# EAGLE board NQSMHS-1 (EAGLE 5.11)
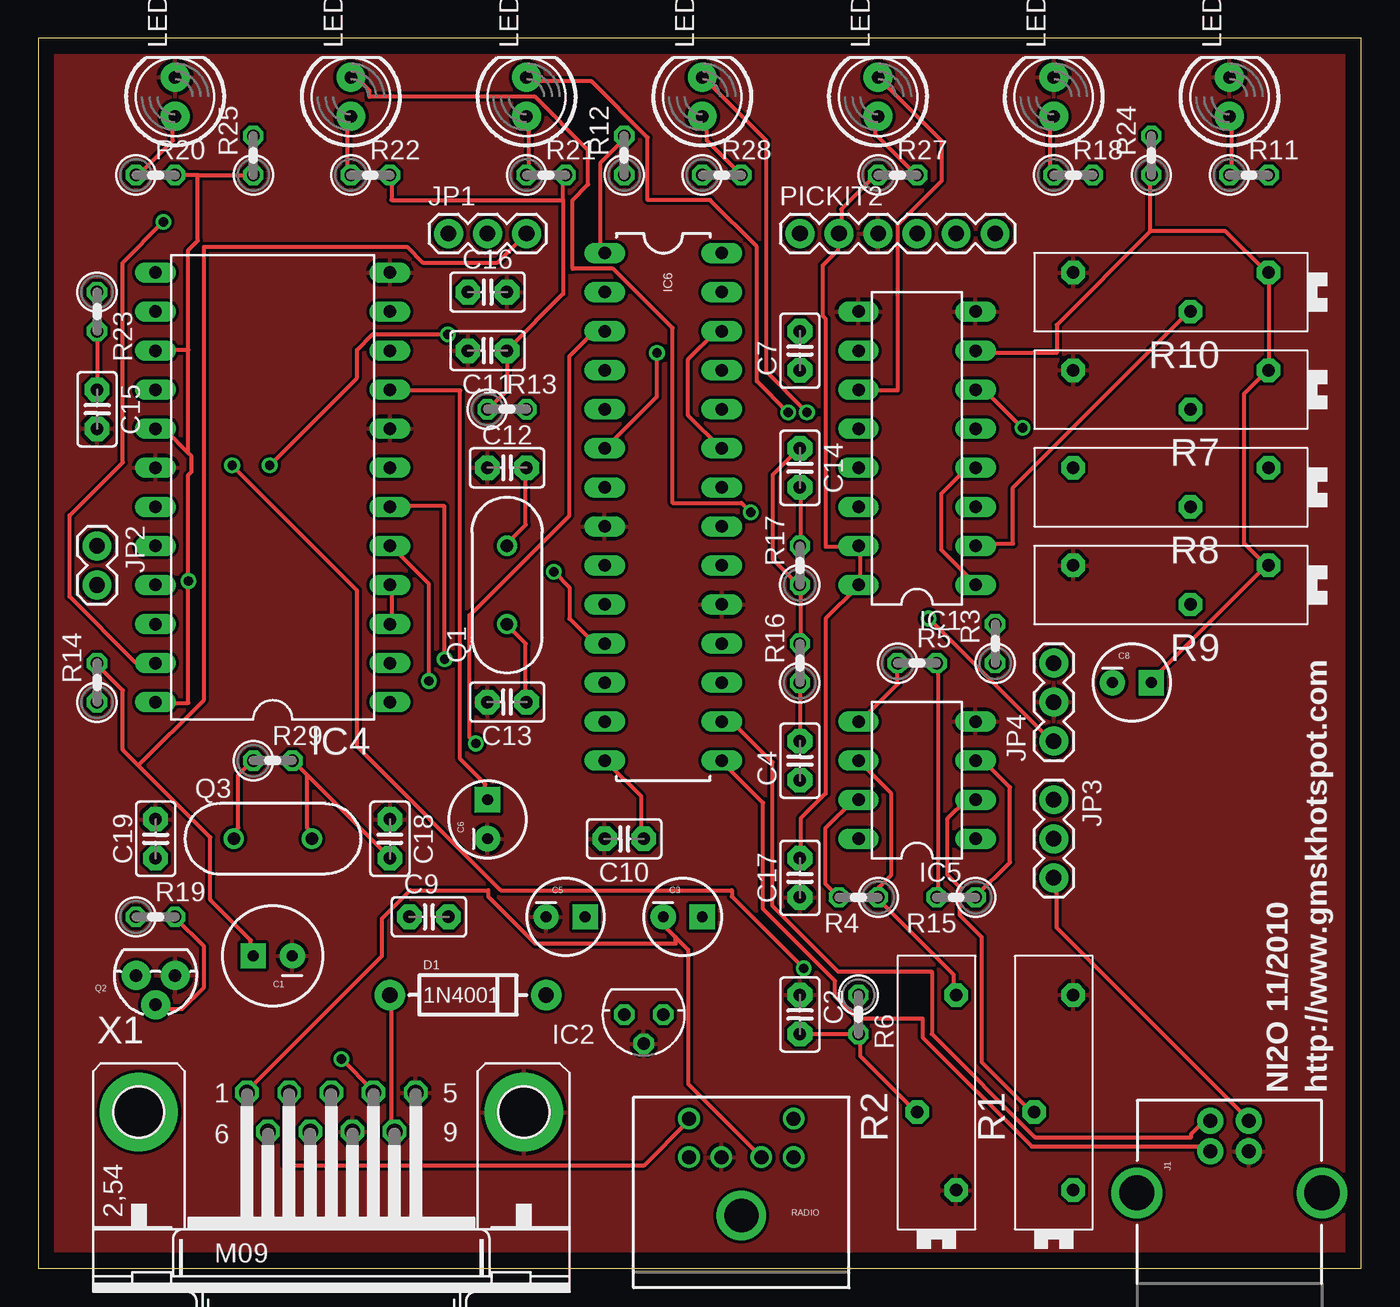
[diagram p0: board, top side]
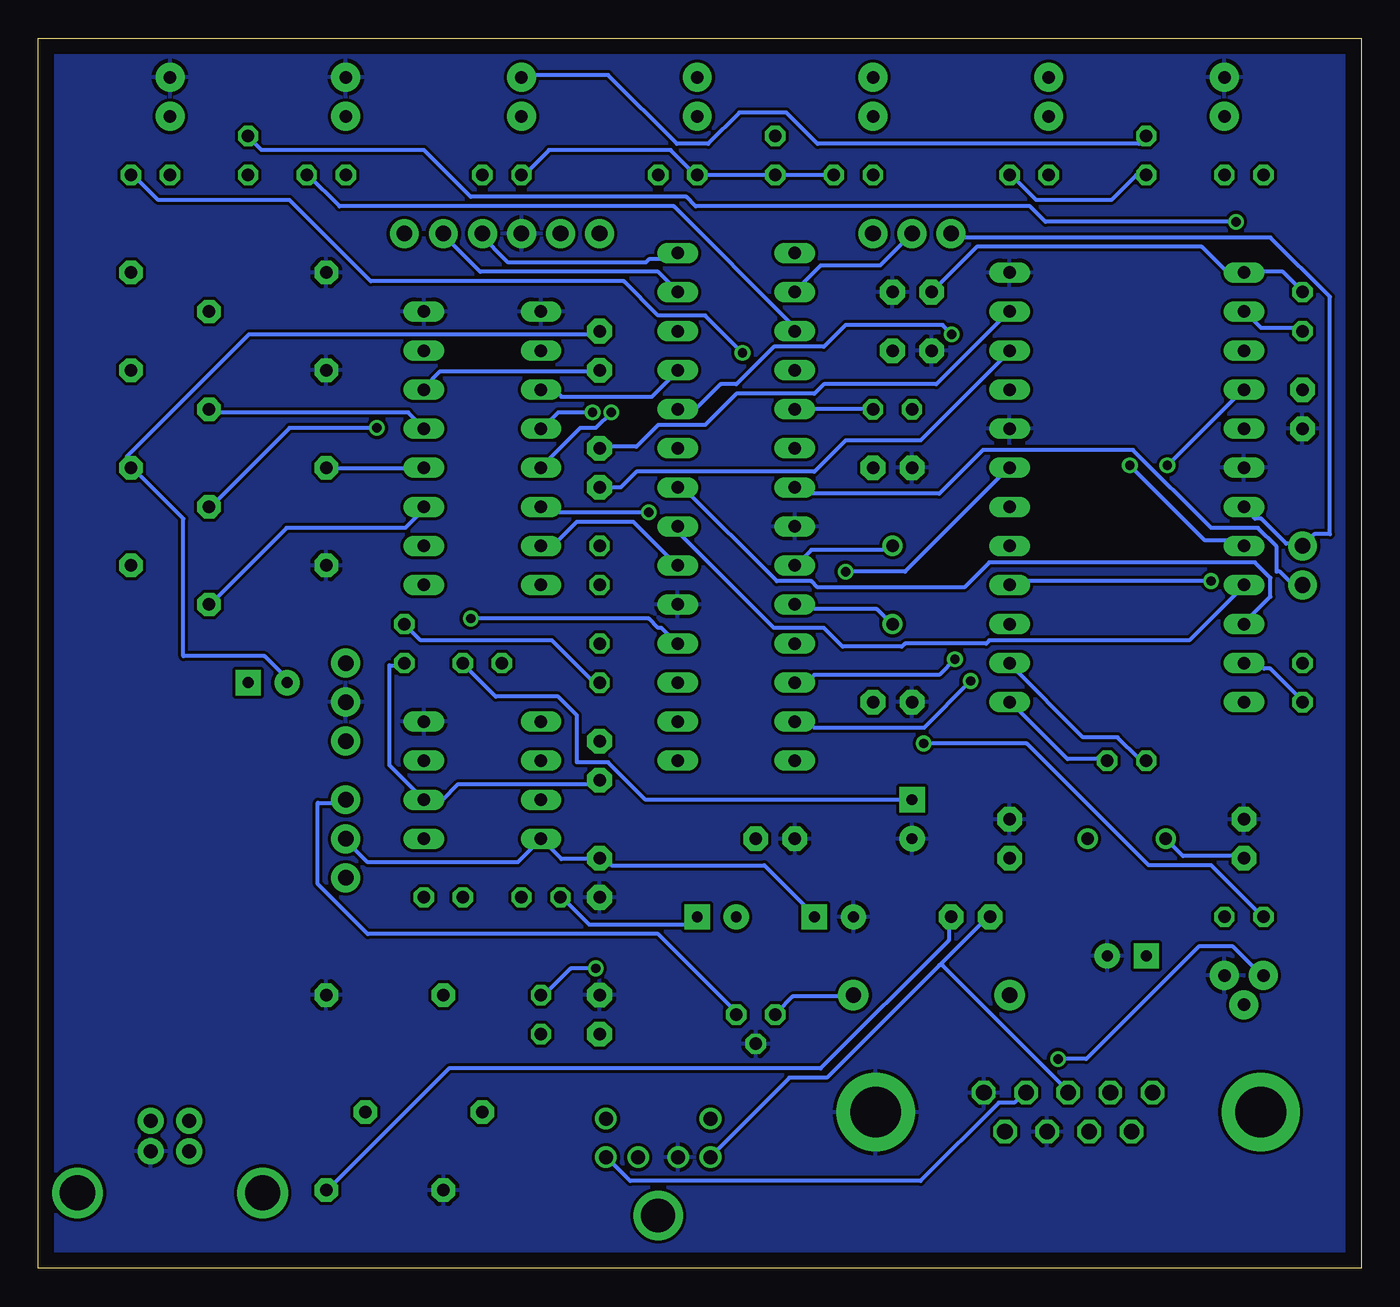
[diagram p1: board, bottom side, seen from below]

Size 86.03 x 80 mm. Coordinates in mm from the lower left corner, seen from the top.
Outline: 0,0 86.03,0 86.03,80 0,80 0,0
Copper layers (1*16): Top 0.035mm / dielectric 1.5mm / Bottom 0.035mm
Design rules "default": minimum track width 10mil, minimum drill 24mil, track to track 8mil, track to pad 8mil, pad to pad 8mil, via to via 8mil, smd to smd 8mil, copper to edge 40mil, drill to drill 8mil, minimum pad ring 10mil, minimum via ring 8mil, stop-mask expansion 4mil, vias tented up to drill 0mil, thermal gap 10mil

## Footprints (pad centres in the part's own frame; a part is rotated, then mirrored left to right if it is on the bottom)
CPOL-RADIAL-100UF-25V = drill 0.7 pad 1.651 square: 1 1.27,0 | drill 0.7 pad 1.651 round: 2 -1.27,0
C2.5-2 = drill 0.813 pad 1.6 octagon: 1 -1.27,0; 2 1.27,0
CPOL-RADIAL-10UF-25V = drill 0.7 pad 1.651 square: 1 1.27,0 | drill 0.7 pad 1.651 round: 2 -1.27,0
DIODE-1N4001 = drill 1 pad 1.981 round: A -5.08,0; C 5.08,0
CA6V = drill 1.016 long: A -2.54,-2.54; E 2.54,-2.54; S 0,2.54
DIL16 = drill 0.813 long: 1 -8.89,-3.81; 2 -6.35,-3.81; 3 -3.81,-3.81; 4 -1.27,-3.81; 5 1.27,-3.81; 6 3.81,-3.81; 7 6.35,-3.81; 8 8.89,-3.81; 9 8.89,3.81; 10 6.35,3.81; 11 3.81,3.81; 12 1.27,3.81; 13 -1.27,3.81; 14 -3.81,3.81; 15 -6.35,3.81; 16 -8.89,3.81
78LXX = drill 0.813 octagon: GND 0,1.905; IN 1.27,0; OUT -1.27,0
DIL24-6 = drill 0.813 long: 1 -13.97,-7.62; 2 -11.43,-7.62; 3 -8.89,-7.62; 4 -6.35,-7.62; 5 -3.81,-7.62; 6 -1.27,-7.62; 7 1.27,-7.62; 8 3.81,-7.62; 9 6.35,-7.62; 10 8.89,-7.62; 11 11.43,-7.62; 12 13.97,-7.62; 13 13.97,7.62; 14 11.43,7.62; 15 8.89,7.62; 16 6.35,7.62; 17 3.81,7.62; 18 1.27,7.62; 19 -1.27,7.62; 20 -3.81,7.62; 21 -6.35,7.62; 22 -8.89,7.62; 23 -11.43,7.62; 24 -13.97,7.62
DIL08 = drill 0.813 long: 1 -3.81,-3.81; 2 -1.27,-3.81; 3 1.27,-3.81; 4 3.81,-3.81; 5 3.81,3.81; 6 1.27,3.81; 7 -1.27,3.81; 8 -3.81,3.81
DIL28-3 = drill 0.813 long: 1 -16.51,-3.81; 2 -13.97,-3.81; 3 -11.43,-3.81; 4 -8.89,-3.81; 5 -6.35,-3.81; 6 -3.81,-3.81; 7 -1.27,-3.81; 8 1.27,-3.81; 9 3.81,-3.81; 10 6.35,-3.81; 11 8.89,-3.81; 12 11.43,-3.81; 13 13.97,-3.81; 14 16.51,-3.81; 15 16.51,3.81; 16 13.97,3.81; 17 11.43,3.81; 18 8.89,3.81; 19 6.35,3.81; 20 3.81,3.81; 21 1.27,3.81; 22 -1.27,3.81; 23 -3.81,3.81; 24 -6.35,3.81; 25 -8.89,3.81; 26 -11.43,3.81; 27 -13.97,3.81; 28 -16.51,3.81
USB-B-PTH = drill 0.914 pad 1.676 round: D+ 0,1.25; D- 1.981,1.25; GND 0,-1.25; VBUS 1.981,-1.25 | drill 2.286 round: P$1 -2.718,-6.02; P$2 -2.718,6.02
1X03 = drill 1.016 pad 1.88 round: 1 0,0; 2 2.54,0; 3 5.08,0
1X02 = drill 1.016 pad 1.88 round: 1 0,0; 2 2.54,0
LED5MM = drill 0.813 pad 1.88 round: A -1.27,0; K 1.27,0
1X06 = drill 1.016 pad 1.88 round: 1 0,0; 2 2.54,0; 3 5.08,0; 4 7.62,0; 5 10.16,0; 6 12.7,0
HC49US = drill 0.813 round: 1 -2.54,0; 2 2.54,0
TO-92 = drill 0.813 pad 1.88 round: 1 -1.27,0; 2 0,1.905; 3 1.27,0
PT-SPIN = drill 0.813 pad 1.524 octagon: 1 -6.35,-1.27; 2 6.35,-1.27; 3 -1.27,1.27
0207/2V = drill 0.813 octagon: 1 -1.27,0; 2 1.27,0
MINI-DIN6 = drill 0.9 round: 1 -1.3,-8.5; 2 1.3,-8.5; 3 -3.4,-8.5; 4 3.4,-8.5; 5 -3.4,-11; 6 3.4,-11 | drill 2.2 round: P$1 0,-4.7
M09HP = drill 1.016 octagon: 1 -5.486,1.27; 2 -2.743,1.27; 3 0,1.27; 4 2.743,1.27; 5 5.486,1.27; 6 -4.115,-1.27; 7 -1.372,-1.27; 8 1.372,-1.27; 9 4.115,-1.27 | drill 3.302 pad 5.08 round: G1 -12.522,0; G2 12.522,0

## Placement (x,y rotation side)
C1  10uF  [CPOL-RADIAL-100UF-25V]  15.24,20.32 180 top
C2  22pF  [C2.5-2]  49.53,16.51 270 top
C3  4.7uF  [CPOL-RADIAL-10UF-25V]  41.91,22.86 0 top
C4  330p  [C2.5-2]  49.53,33.02 90 top
C5  47uF  [CPOL-RADIAL-10UF-25V]  34.29,22.86 0 top
C6  1uF  [CPOL-RADIAL-10UF-25V]  29.21,29.21 90 top
C7  0.1uF  [C2.5-2]  49.53,59.69 90 top
C8  10uF  [CPOL-RADIAL-10UF-25V]  71.12,38.1 0 top
C9  0.1uF  [C2.5-2]  25.4,22.86 0 top
C10  0.1uF  [C2.5-2]  38.1,27.94 180 top
C11  0.1uF  [C2.5-2]  29.21,59.69 180 top
C12  22pF  [C2.5-2]  30.48,52.07 0 top
C13  22pF  [C2.5-2]  30.48,36.83 180 top
C14  22pF  [C2.5-2]  49.53,52.07 270 top
C15  0.1uF  [C2.5-2]  3.81,55.88 270 top
C16  0.1uF  [C2.5-2]  29.21,63.5 0 top
C17  0.1uF  [C2.5-2]  49.53,25.4 90 top
C18  22pF  [C2.5-2]  22.86,27.94 270 top
C19  22pF  [C2.5-2]  7.62,27.94 90 top
D1  1N4001  [DIODE-1N4001]  27.94,17.78 0 top
E$1  [CA6V]  100.33,19.05 180 top  (outside the outline)
E$2  [CA6V]  111.76,20.32 180 top  (outside the outline)
E$3  [CA6V]  111.76,29.21 180 top  (outside the outline)
E$4  [CA6V]  111.76,40.64 180 top  (outside the outline)
E$5  [CA6V]  110.49,52.07 180 top  (outside the outline)
E$6  [CA6V]  109.22,62.23 180 top  (outside the outline)
IC1  MAX8213  [DIL16]  57.15,53.34 90 top
IC2  78L05  [78LXX]  39.37,16.51 180 top
IC4  CMX589PA4  [DIL24-6]  15.24,50.8 90 top
IC5  LM4558  [DIL08]  57.15,31.75 90 top
IC6  PIC18F2550  [DIL28-3]  40.64,49.53 270 top
J1  USBPTH  [USB-B-PTH]  77.47,7.62 90 top
JP1  SW4  [1X03]  26.67,67.31 0 top
JP2  SW3  [1X02]  3.81,46.99 270 top
JP3  SW1  [1X03]  66.04,30.48 270 top
JP4  SERIAL  [1X03]  66.04,34.29 90 top
LED1  COS  [LED5MM]  77.47,76.2 90 top
LED2  PWR  [LED5MM]  8.89,76.2 90 top
LED3  PTT  [LED5MM]  66.04,76.2 90 top
LED4  MED  [LED5MM]  31.75,76.2 90 top
LED5  LOW  [LED5MM]  43.18,76.2 90 top
LED6  DCOS  [LED5MM]  54.61,76.2 90 top
LED7  HIGH  [LED5MM]  20.32,76.2 90 top
PICKIT2  PICKIT2  [1X06]  49.53,67.31 0 top
Q1  24MHz  [HC49US]  30.48,44.45 90 top
Q2  2N3904  [TO-92]  7.62,19.05 180 top
Q3  4.9152MHz  [HC49US]  15.24,27.94 0 top
R1  500K  [PT-SPIN]  66.04,11.43 90 top
R2  500K  [PT-SPIN]  58.42,11.43 90 top
R3  180K  [0207/2V]  62.23,40.64 90 top
R4  47K  [0207/2V]  53.34,24.13 180 top
R5  510K  [0207/2V]  57.15,39.37 0 top
R6  100K  [0207/2V]  53.34,16.51 270 top
R7  100K  [PT-SPIN]  73.66,57.15 180 top
R8  10K  [PT-SPIN]  73.66,50.8 180 top
R9  100K  [PT-SPIN]  73.66,44.45 180 top
R10  100K  [PT-SPIN]  73.66,63.5 180 top
R11  47K  [0207/2V]  78.74,71.12 0 top
R12  10K  [0207/2V]  38.1,72.39 90 top
R13  47K  [0207/2V]  30.48,55.88 0 top
R14  27K  [0207/2V]  3.81,38.1 90 top
R15  510K  [0207/2V]  59.69,24.13 180 top
R16  100K  [0207/2V]  49.53,39.37 90 top
R17  100K  [0207/2V]  49.53,45.72 90 top
R18  1K  [0207/2V]  67.31,71.12 0 top
R19  4K7  [0207/2V]  7.62,22.86 0 top
R20  1K  [0207/2V]  7.62,71.12 0 top
R21  470R  [0207/2V]  33.02,71.12 0 top
R22  470R  [0207/2V]  21.59,71.12 0 top
R23  1M  [0207/2V]  3.81,62.23 270 top
R24  27K  [0207/2V]  72.39,72.39 90 top
R25  47K  [0207/2V]  13.97,72.39 90 top
R27  470R  [0207/2V]  55.88,71.12 0 top
R28  470R  [0207/2V]  44.45,71.12 0 top
R29  1M  [0207/2V]  15.24,33.02 0 top
RADIO  MINI-DIN6PTH  [MINI-DIN6]  45.72,-1.27 180 top
X1  DB9M  [M09HP]  19.05,10.16 0 top

## Library data of the parts
C1 C3 C5 C6 C8 D1 IC6 J1 JP1-JP4 LED1-LED7 PICKIT2 Q1-Q3 RADIO = SparkFun
C2 C4 C7 C9-C19 = capacitor-wima
E$1-E$6 = pot
IC1 IC4 = ic-package
IC2 = v-reg
IC5 = linear
R1 R2 R7-R10 = rcl
R3-R6 R11-R25 R27-R29 = resistor
X1 = con-subd

## Nets
+5V: J1.VBUS JP3.3
+12V: D1.A X1.9
COS: IC1.11 IC6.25 LED6.K R25.2
COS/COR/SQL: RADIO.6 X1.2
GND: C1.2 C2.1 C5.2 C6.2 C10.2 C11.2 C12.1 C13.2 C15.2 C16.2 C17.1 C18.1 C19.2 IC1.8 IC1.9 IC2.GND IC4.8 IC4.12 IC4.18 IC5.4 IC6.8 IC6.19 J1.GND JP4.2 LED1.K LED2.K LED3.K PICKIT2.3 Q2.1 R1.2 R2.1 R7.2 R9.2 R10.2 RADIO.2 X1.5 X1.8 X1.G2
N$1: IC6.1 R12.2
N$2: D1.C IC2.IN
N$3: IC6.23 IC6.26
N$4: IC6.5 R13.2
N$5: IC6.6 R11.2
N$6: LED1.A R11.1
N$7: IC6.7 JP2.2
N$8: C1.1 JP1.3 R14.2
N$9: C12.2 IC6.9 Q1.2
N$10: C13.1 IC6.10 Q1.1
N$11: C10.1 IC6.14
N$12: IC2.OUT JP3.1
N$13: LED2.A R20.1
N$14: Q2.2 R19.2
N$15: C4.2 R3.2 R16.1
N$16: LED3.A R18.1
N$17: IC5.3 R15.1
N$18: C4.1 IC5.2 R1.3 R3.1
N$19: IC5.6 R2.2 R4.1
N$20: C9.2 R1.1
N$21: C2.2 R2.3 R6.2
N$22: C3.1 IC5.7 R4.2
N$23: C8.1 IC1.7 R7.1 R9.1 R10.1 R24.1
N$24: IC5.5 R5.1
N$25: C7.1 IC1.6 R8.3
N$26: C7.2 C8.2 R8.1
N$27: IC1.1 IC1.4 R8.2
N$28: IC1.14 LED7.K
N$29: LED7.A R22.1
N$30: IC1.13 LED4.K
N$31: LED4.A R21.1
N$32: IC1.12 LED5.K
N$33: IC1.2 R10.3
N$34: LED6.A R27.2
N$35: LED5.A R28.2
N$36: IC1.5 R7.3
N$38: C18.2 IC4.1 Q3.2 R29.2
N$39: IC1.3 R9.3
N$40: X1.7
N$41: X1.6
N$42: C16.1 IC4.13 R23.1
N$43: C15.1 IC4.14 R23.2
N$59: C19.1 IC4.2 Q3.1 R29.1
PGC: IC6.27 PICKIT2.5
PGD: IC6.28 PICKIT2.4
PLLACQ: IC4.7 IC6.11
PTT: IC6.3 R18.2 R19.1
RCFB: C14.2 IC4.10 R17.2
RX-232: IC6.18 JP4.1
RXCLOCK: IC4.21 IC6.21
RXDATA: IC4.20 IC6.24
RXDATA/SPKR: C9.1 RADIO.4 X1.3
RXDCACQ: IC4.6 IC6.12
RXHOLD: IC4.5 IC6.13
RXSIGIN: C14.1 IC4.11 R16.2 R17.1
RXSN: IC4.23 R14.1 R24.2
TRXPTT: Q2.3 RADIO.3 X1.4
TX-232: IC6.17
TX/SN: IC6.2 JP1.2
TXCLOCK: IC4.22 IC6.22
TXDATA: IC4.19 JP1.1 JP2.1
TXDATA/MIC: C3.2 RADIO.1 X1.1
TXOUT: IC4.16 R6.1
USB+: IC6.16 J1.D-
USB-: IC6.15 J1.D+
VBIAS: C6.1 IC4.9 R5.2 R15.2
VCC: C5.1 C11.1 C17.2 IC1.15 IC1.16 IC4.3 IC4.4 IC4.15 IC4.17 IC4.24 IC5.8 IC6.20 JP3.2 PICKIT2.2 R12.1 R13.1 R20.2 R21.2 R22.2 R25.1 R27.1 R28.1
VPP: PICKIT2.1

## Tracks (layer width: path | path; a pad name or v marks a point on that pad's centre or on a via)
+5V
  Top 0.254: JP3.3 66.04,24.59 66.24,24.38 66.24,22.15 78.64,9.75 J1.VBUS
+12V
  Top 0.254: X1.9 23.16,8.94 22.96,9.14 22.96,17.68 D1.A
COS
  Top 0.254: IC1.11 53.44,57.1 55.88,57.1 55.88,67.87 58.73,70.71 58.73,73.36 LED6.K
  Bottom 0.254: IC6.25 44.5,58.32 46.13,56.69 52.02,56.69 52.43,57.1 53.24,57.1 IC1.11 | R25.2 14.02,73.56 14.43,73.15 35.36,73.15 37.39,75.18 40.44,75.18 42.47,73.15 44.5,73.15 48.97,77.62 54.46,77.62 LED6.K
COS/COR/SQL
  Top 0.254: RADIO.6 42.27,9.55 39.42,6.71 16.05,6.71 16.05,11.18 X1.2
GND
  pour Bottom: 0,80.01 86.36,80.01 86.36,0 0,0
  pour Top: 0,80.01 86.36,80.01 86.36,0 0,0
N$1
  Top 0.254: IC6.1 36.78,66.04 36.58,66.24 36.58,71.93 38,73.36 38,73.56 R12.2
N$2
  Bottom 0.254: IC2.IN 38,16.66 36.98,17.68 33.12,17.68 D1.C
N$3
  Top 0.254: IC6.23 44.3,53.44 42.27,55.47 42.27,59.13 44.09,60.96 IC6.26
N$4
  Bottom 0.254: R13.2 IC6.5
N$5  (via drill 0.61)
  Top 0.254: v40.23,59.54 40.23,56.69 36.98,53.44 IC6.6
  Bottom 0.254: v40.23,59.54 42.67,61.98 45.72,61.98 47.95,64.21 64.41,64.21 69.7,69.49 78.23,69.49 79.86,71.12 R11.2
N$6
  Top 0.254: R11.1 77.62,71.12 77.62,74.78 LED1.A
N$7
  Bottom 0.254: IC6.7 36.78,50.8 36.37,50.39 27.43,50.39 24.59,53.24 14.83,53.24 9.75,48.16 6.71,48.16 5.49,46.94 5.49,45.31 5.28,45.31 4.47,44.5 3.86,44.5 JP2.2
N$8
  Top 0.254: 6.5,32.72 11.18,28.04 11.18,23.98 13.82,21.34 13.82,20.32 C1.1 | 6.5,32.72 5.49,33.73 5.49,37.59 3.86,39.22 R14.2 | 6.5,32.72 10.77,36.98 10.77,66.45 23.98,66.45 24.99,65.43 29.87,65.43 JP1.3
N$9
  Top 0.254: Q1.2 30.48,47.14 31.7,48.36 31.7,52.02 C12.2
  Bottom 0.254: IC6.9 36.78,45.72 35.76,46.74 30.68,46.74 30.48,46.94 Q1.2
N$10
  Top 0.254: Q1.1 30.48,41.86 31.7,40.64 31.7,36.98 C13.1
  Bottom 0.254: IC6.10 36.78,43.08 36.58,42.88 31.5,42.88 30.68,42.06 30.48,42.06 Q1.1
N$11
  Top 0.254: IC6.14 36.98,32.92 39.22,30.68 39.22,28.04 C10.1
N$12
  Bottom 0.254: JP3.1 66.24,30.28 67.87,30.28 67.87,24.99 64.62,21.74 45.72,21.74 40.64,16.66 IC2.OUT
N$13
  Top 0.254: R20.1 6.5,71.12 8.74,73.36 8.74,74.78 LED2.A
N$14
  Top 0.254: R19.2 8.94,22.76 10.77,20.93 10.77,18.29 9.35,16.87 7.72,16.87 7.72,17.07 Q2.2
N$15
  Top 0.254: R16.1 49.58,38 49.58,34.34 C4.2
  Bottom 0.254: R3.2 61.16,40.84 52.63,40.84 49.99,38.2 49.58,38.2 R16.1
N$16
  Top 0.254: R18.1 65.84,71.32 65.84,74.57 66.04,74.78 LED3.A
N$17
  Top 0.254: R15.1 60.96,24.18 63.2,26.42 63.2,31.29 61.57,32.92 60.96,32.92 IC5.3
N$18
  Top 0.254: IC5.2 60.35,30.48 59.13,29.26 59.13,25.6 59.94,24.79 59.94,22.96 61.37,21.54 61.37,13.41 64.62,10.16 R1.3
  Bottom 0.254: R3.1 62.38,39.22 63.2,39.22 63.2,32.72 IC5.2 59.74,30.48 58.73,31.5 49.78,31.5 C4.1
N$19
  Top 0.254: R2.2 59.54,17.88 59.54,19.1 54.66,23.98 R4.1 54.66,24.18 54.66,24.79 55.47,25.6 55.47,30.89 IC5.6
N$20
  Bottom 0.254: R1.1 67.26,5.08 59.33,13.01 35.15,13.01 26.82,21.34 26.82,22.76 C9.2
N$21
  Top 0.254: C2.2 R6.2 53.44,15.24 53.44,13.82 57.1,10.16 R2.3
N$22
  Top 0.254: R4.2 51.21,24.99 51.21,28.65 53.03,30.48 IC5.7
  Bottom 0.254: C3.1 43.69,22.35 50.19,22.35 51.82,23.98 52.02,23.98 R4.2
N$23
  Top 0.254: 79.86,45.72 72.54,38.41 72.54,38.2 C8.1 | 72.34,67.46 66.24,61.37 66.24,59.54 60.96,59.54 IC1.7 | 72.34,67.46 72.34,71.12 R24.1 | 72.34,67.46 77.22,67.46 79.86,64.82 R10.1 80.06,64.62 80.06,58.52 R7.1 79.86,58.32 78.44,56.9 78.44,47.14 79.86,45.72 | 79.86,45.72 R9.1
N$24
  Top 0.254: IC5.5 53.44,35.56 55.88,38 R5.1
N$25  (via drill 0.61)
  Top 0.254: v64.01,54.66 61.57,57.1 60.96,57.1 IC1.6
  Bottom 0.254: IC1.6 60.96,57.3 59.94,58.32 49.58,58.32 C7.1 | v64.01,54.66 69.7,54.66 74.78,49.58 R8.3
N$26
  Bottom 0.254: C8.2 69.7,38.2 71.32,39.83 76.61,39.83 76.61,48.77 79.86,52.02 R8.1 80.06,52.22 80.26,52.22 80.26,52.83 72.34,60.76 49.78,60.76 49.58,60.96 C7.2
N$27
  Top 0.254: IC1.1 60.96,44.5 58.73,46.74 58.73,50.39 60.35,52.02 60.96,52.02 IC1.4
  Bottom 0.254: R8.2 67.26,52.02 60.96,52.02 IC1.4
N$28  (via drill 0.61)
  Top 0.254: v46.33,49.17 45.72,49.78 41.25,49.78 41.25,61.16 37.39,65.02 34.75,65.02 34.75,69.49 35.76,70.51 35.76,72.75 32.31,76.2 21.54,76.2 21.54,76.61 20.73,77.42 20.32,77.42 LED7.K
  Bottom 0.254: v46.33,49.17 53.03,49.17 53.24,49.38 IC1.14
N$29
  Top 0.254: R22.1 20.12,71.32 20.12,74.57 20.32,74.78 LED7.A
N$30  (via drill 0.61)
  Top 0.254: v48.77,55.68 46.74,57.71 46.74,66.45 43.69,69.49 39.62,69.49 39.62,73.56 35.97,77.22 31.9,77.22 31.9,77.42 LED4.K
  Bottom 0.254: v48.77,55.68 49.78,54.66 50.8,54.66 53.24,52.22 IC1.13
N$31
  Top 0.254: R21.1 31.9,71.12 31.9,74.78 LED4.A
N$32  (via drill 0.61)
  Top 0.254: v49.99,55.68 47.35,58.32 47.35,73.36 43.28,77.42 LED5.K
  Bottom 0.254: v49.99,55.68 52.22,55.68 53.24,54.66 IC1.12
N$33
  Top 0.254: IC1.2 60.96,47.14 63.4,47.14 63.4,50.8 74.78,62.18 R10.3
N$34
  Top 0.254: R27.2 57.1,71.12 54.46,73.76 54.46,74.78 LED6.A
N$35
  Top 0.254: R28.2 43.48,73.36 43.48,73.97 43.28,74.17 43.28,74.78 LED5.A
N$36
  Bottom 0.254: IC1.5 60.96,54.66 61.98,55.68 74.57,55.68 74.78,55.88 R7.3
N$38
  Top 0.254: 17.48,32.11 16.66,32.92 R29.2 | 17.48,32.11 17.48,28.65 17.68,28.45 17.68,28.04 Q3.2 | 17.48,32.11 22.76,26.82 C18.2
  Bottom 0.254: IC4.1 22.76,36.78 19.1,33.12 16.66,33.12 R29.2
N$39
  Bottom 0.254: IC1.3 60.96,49.38 62.18,48.16 69.9,48.16 74.78,43.28 R9.3
N$42
  Bottom 0.254: R23.1 3.86,63.6 5.08,64.82 7.52,64.82 IC4.13 7.72,64.82 8.74,64.82 10.36,66.45 24.99,66.45 C16.1
N$43
  Top 0.254: R23.2 3.86,60.96 3.86,57.3 C15.1
  Bottom 0.254: IC4.14 7.52,62.18 6.5,61.16 4.06,61.16 3.86,60.96 R23.2
N$59
  Top 0.254: R29.1 13.82,32.92 13.01,32.11 13.01,28.65 12.8,28.45 12.8,28.04 Q3.1
  Bottom 0.254: Q3.1 11.58,26.82 7.72,26.82 C19.1 | IC4.2 22.76,39.22 18.09,34.54 15.85,34.54 14.43,33.12 14.02,33.12 R29.1
PGC
  Bottom 0.254: IC6.27 44.5,63.6 45.72,64.82 57.3,64.82 59.74,67.26 PICKIT2.5
PGD
  Bottom 0.254: IC6.28 44.5,66.04 44.91,65.63 46.33,65.63 46.53,65.43 55.47,65.43 57.3,67.26 PICKIT2.4
PLLACQ  (via drill 0.61)
  Top 0.254: v33.53,45.31 34.54,44.3 34.54,42.27 36.17,40.64 IC6.11
  Bottom 0.254: v33.53,45.31 29.67,45.31 22.96,52.02 IC4.7
PTT  (via drill 0.61)
  Top 0.254: v28.45,34.14 28.04,34.54 28.04,42.47 34.54,48.97 34.54,59.33 36.17,60.96 IC6.3
  Bottom 0.254: v28.45,34.14 21.74,34.14 13.82,26.21 9.75,26.21 6.5,22.96 R19.1 | R18.2 68.48,71.12 66.45,69.09 44.7,69.09 36.98,61.37 36.98,60.96 IC6.3
RCFB
  Top 0.254: R17.2 49.58,47.14 49.58,50.8 C14.2
  Bottom 0.254: IC4.10 22.96,59.54 28.65,53.85 33.53,53.85 35.56,51.82 47.14,51.82 48.16,50.8 C14.2
RX-232  (via drill 0.61)
  Top 0.254: v57.91,42.27 66.04,34.14 JP4.1
  Bottom 0.254: v57.91,42.27 46.33,42.27 45.72,41.66 45.52,41.66 44.5,40.64 IC6.18
RXCLOCK
  Bottom 0.254: IC4.21 7.72,44.3 11.18,40.84 24.18,40.84 24.38,40.64 29.67,40.64 29.87,40.44 33.73,40.44 34.95,41.66 38.2,41.66 44.3,47.75 44.3,48.16 IC6.21
RXDATA  (via drill 0.61)
  Top 0.254: v15.04,52.22 20.73,57.91 20.73,59.74 21.74,60.76 v26.62,60.76
  Bottom 0.254: v15.04,52.22 10.16,47.35 7.92,47.35 7.72,47.14 IC4.20 | v26.62,60.76 27.23,61.37 33.53,61.37 34.95,59.94 38.2,59.94 40.64,57.51 41.66,57.51 43.28,55.88 IC6.24
RXDATA/SPKR
  Bottom 0.254: 27.43,19.71 24.38,22.76 24.18,22.76 C9.1 | 27.43,19.71 34.75,12.39 37.19,12.39 42.27,7.32 RADIO.4 | 27.43,19.71 27.23,19.71 19.1,11.58 X1.3
RXDCACQ  (via drill 0.61)
  Top 0.254: v26.42,39.62 26.42,49.58 22.96,49.58 IC4.6
  Bottom 0.254: v26.42,39.62 27.43,38.61 35.56,38.61 35.97,38.2 36.78,38.2 IC6.12
RXHOLD  (via drill 0.61)
  Top 0.254: v25.4,38.2 25.4,44.5 22.96,46.94 IC4.5
  Bottom 0.254: v25.4,38.2 28.45,35.15 35.56,35.15 35.97,35.56 IC6.13
RXSIGIN
  Top 0.254: R16.2 49.58,40.64 49.58,44.3 R17.1 49.38,44.5 47.75,46.13 47.75,51.61 49.38,53.24 C14.1
  Bottom 0.254: IC4.11 22.96,62.18 27.64,57.51 34.95,57.51 35.56,56.9 40.64,56.9 42.67,54.86 45.72,54.86 47.14,53.44 49.38,53.44 C14.1
RXSN  (via drill 0.61)
  Top 0.254: v8.13,68.07 5.49,65.43 5.49,52.43 2.03,48.97 2.03,43.69 6.3,39.42 7.52,39.42 IC4.23
  Bottom 0.254: R14.1 3.86,36.98 5.89,39.01 6.3,39.01 6.5,39.22 7.52,39.22 IC4.23 | v8.13,68.07 20.52,68.07 21.54,69.09 43.28,69.09 43.89,69.7 57.91,69.7 60.96,72.75 71.53,72.75 72.34,73.56 R24.2
TRXPTT  (via drill 0.61)
  Top 0.254: v19.71,13.61 21.74,11.58 X1.4
  Bottom 0.254: RADIO.3 48.97,7.11 47.55,5.69 28.65,5.69 23.57,10.77 22.55,10.77 21.95,11.38 X1.4 | v19.71,13.61 17.88,13.61 10.57,20.93 8.33,20.93 6.5,19.1 Q2.3
TX/SN
  Bottom 0.254: IC6.2 36.78,63.6 35.15,65.23 31.29,65.23 JP1.2
TXCLOCK
  Bottom 0.254: IC4.22 7.52,42.06 5.89,43.69 5.89,44.91 6.91,45.92 24.18,45.92 25.81,44.3 35.36,44.3 35.76,44.7 38,44.7 44.09,50.8 IC6.22
TXDATA
  Bottom 0.254: IC4.19 7.52,49.38 6.91,48.77 6.5,48.77 4.88,47.14 3.86,47.14 JP2.1 3.05,47.75 2.03,47.75 2.03,63.2 5.89,67.06 26.42,67.06 JP1.1
TXDATA/MIC
  Top 0.254: 41.45,21.54 40.64,22.35 C3.2 | 41.45,21.54 42.27,20.73 42.27,11.99 46.94,7.32 RADIO.1 | 41.45,21.54 41.45,21.13 32.31,21.13 29.26,24.18 29.26,24.59 24.18,24.59 22.35,22.76 22.35,20.32 13.61,11.58 X1.1
TXOUT  (via drill 0.61)
  Top 0.254: v12.6,52.22 20.73,44.09 20.73,33.93 30.07,24.59 45.11,24.59 45.11,24.18 v49.78,19.51
  Bottom 0.254: v12.6,52.22 7.72,57.1 IC4.16 | v49.78,19.51 51.41,19.51 53.03,17.88 53.24,17.88 R6.1
USB+
  Top 0.254: IC6.16 45.52,35.56 45.52,35.15 47.75,32.92 47.75,23.57 52.02,19.3 58.12,19.3 58.12,15.24 64.82,8.53 74.98,8.53 74.98,8.74 75.79,9.55 76.2,9.55 J1.D-
USB-
  Top 0.254: IC6.15 44.5,32.92 47.14,30.28 47.14,23.37 51.82,18.69 51.82,17.68 53.24,16.26 57.51,16.26 57.51,15.04 64.62,7.92 76.2,7.92 76.2,7.72 J1.D+
VBIAS
  Top 0.254: R15.2 58.52,24.18 58.52,39.22 R5.2 | IC4.9 22.96,57.1 27.43,57.1 27.43,33.12 29.06,31.5 29.06,30.48 C6.1
  Bottom 0.254: R5.2 58.32,39.22 56.29,37.19 52.22,37.19 51,35.97 51,32.92 48.97,32.92 46.53,30.48 C6.1
VCC  (via drill 0.61)
  Top 0.254: C17.2 49.58,26.82 49.58,29.26 51.21,30.89 51.21,42.27 53.24,44.3 IC1.16 53.44,44.5 53.44,46.94 IC1.15 53.24,46.94 51.21,46.94 51.21,61.77 51,61.98 51,65.23 52.02,66.24 52.02,67.26 PICKIT2.2 52.22,67.46 52.22,68.89 54.46,71.12 R27.1 | R13.1 29.26,55.88 30.48,57.1 C11.1 30.48,59.74 34.14,63.4 34.14,69.49 | 34.14,69.49 34.14,71.12 R21.2 | 10.36,71.12 R20.2 | 10.36,71.12 R25.1 | IC4.3 22.96,42.06 22.96,44.3 IC4.4 | 9.75,53.03 8.33,54.46 7.72,54.46 IC4.17 | 9.75,53.03 9.96,52.83 9.96,51.82 9.75,51.61 v9.75,44.7 9.75,36.78 7.72,36.78 IC4.24 | 9.75,59.74 7.72,59.74 IC4.15 | 9.75,53.03 9.75,59.74 | 10.36,71.12 10.36,66.85 9.75,66.24 9.75,59.74 | 34.14,69.49 22.96,69.49 22.96,71.12 R22.2
  Bottom 0.254: IC6.20 44.5,45.72 47.35,48.56 51,48.56 52.43,47.14 53.24,47.14 IC1.15 | C5.1 35.56,22.96 38.81,26.21 48.77,26.21 49.17,26.62 49.38,26.62 C17.2 49.58,26.62 52.02,26.62 IC5.8 54.86,26.42 64.62,26.42 66.04,27.84 JP3.2 | R21.2 R12.1 R28.1 43.28,71.12 44.91,72.75 52.83,72.75 54.46,71.12 R27.1 | R22.2 22.76,71.12 21.13,69.49 16.26,69.49 14.63,71.12 R25.1 | v9.75,44.7 22.55,44.7 22.76,44.5 IC4.4

## Text on the board
Top: NQSMHS V2
Bottom: NQSMHS V2
tPlace: NI2O 11/2010 | http://www.gmskhotspot.com